# EAGLE board ex.05 (EAGLE 9.6.2)
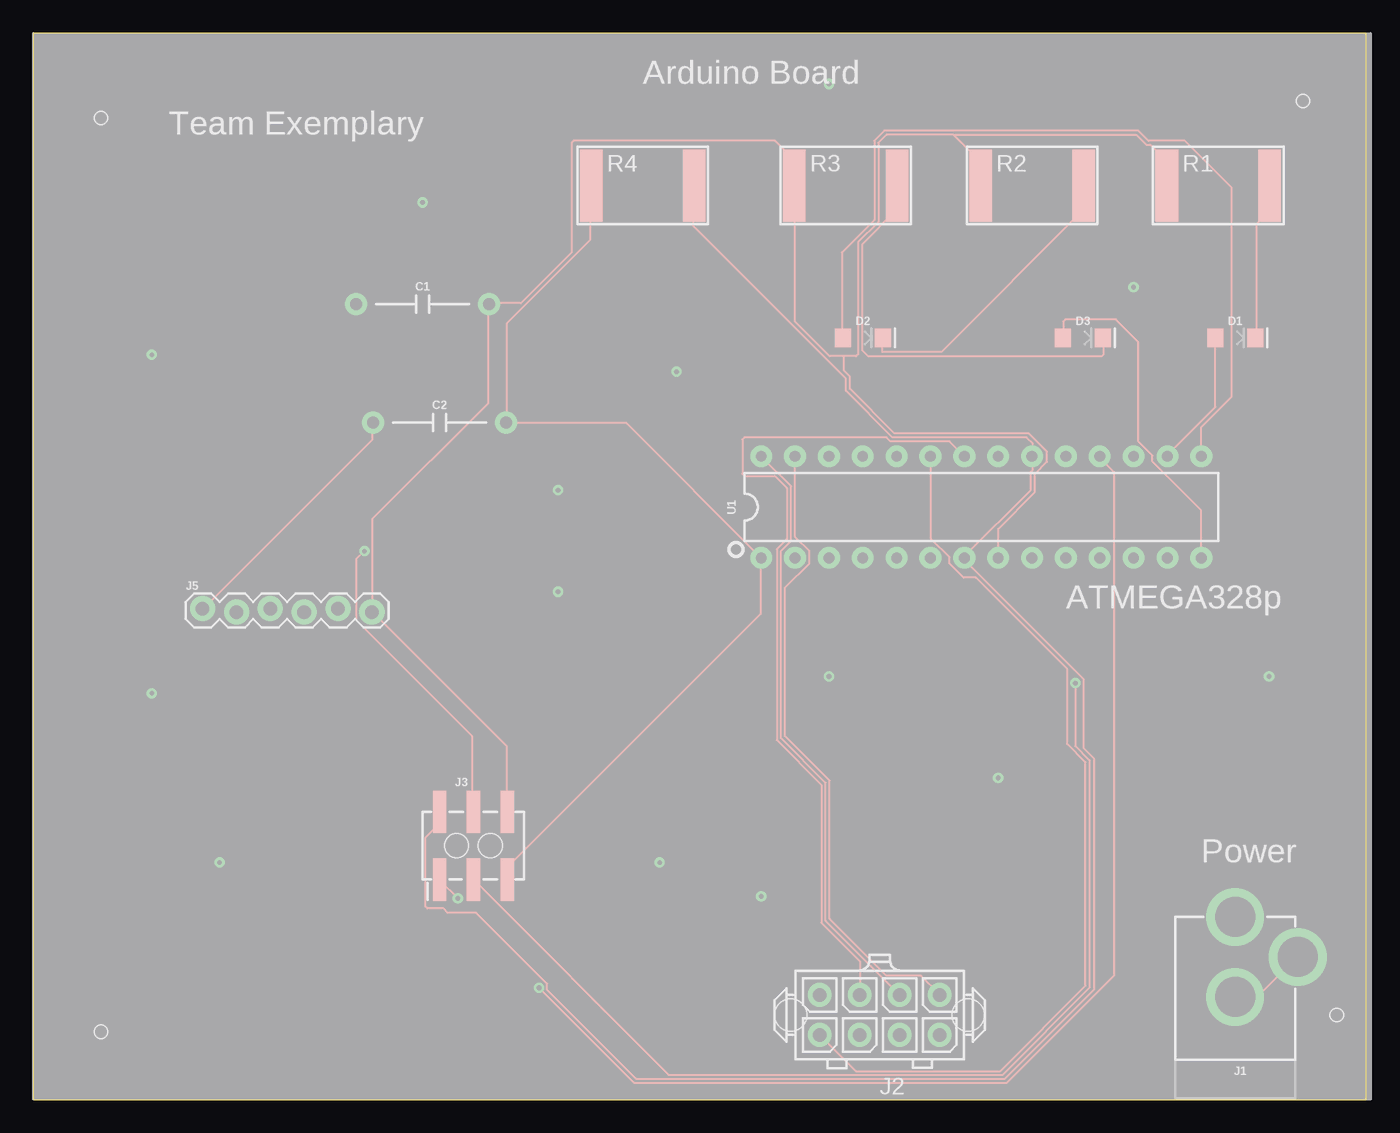
[diagram p0: board, top side]
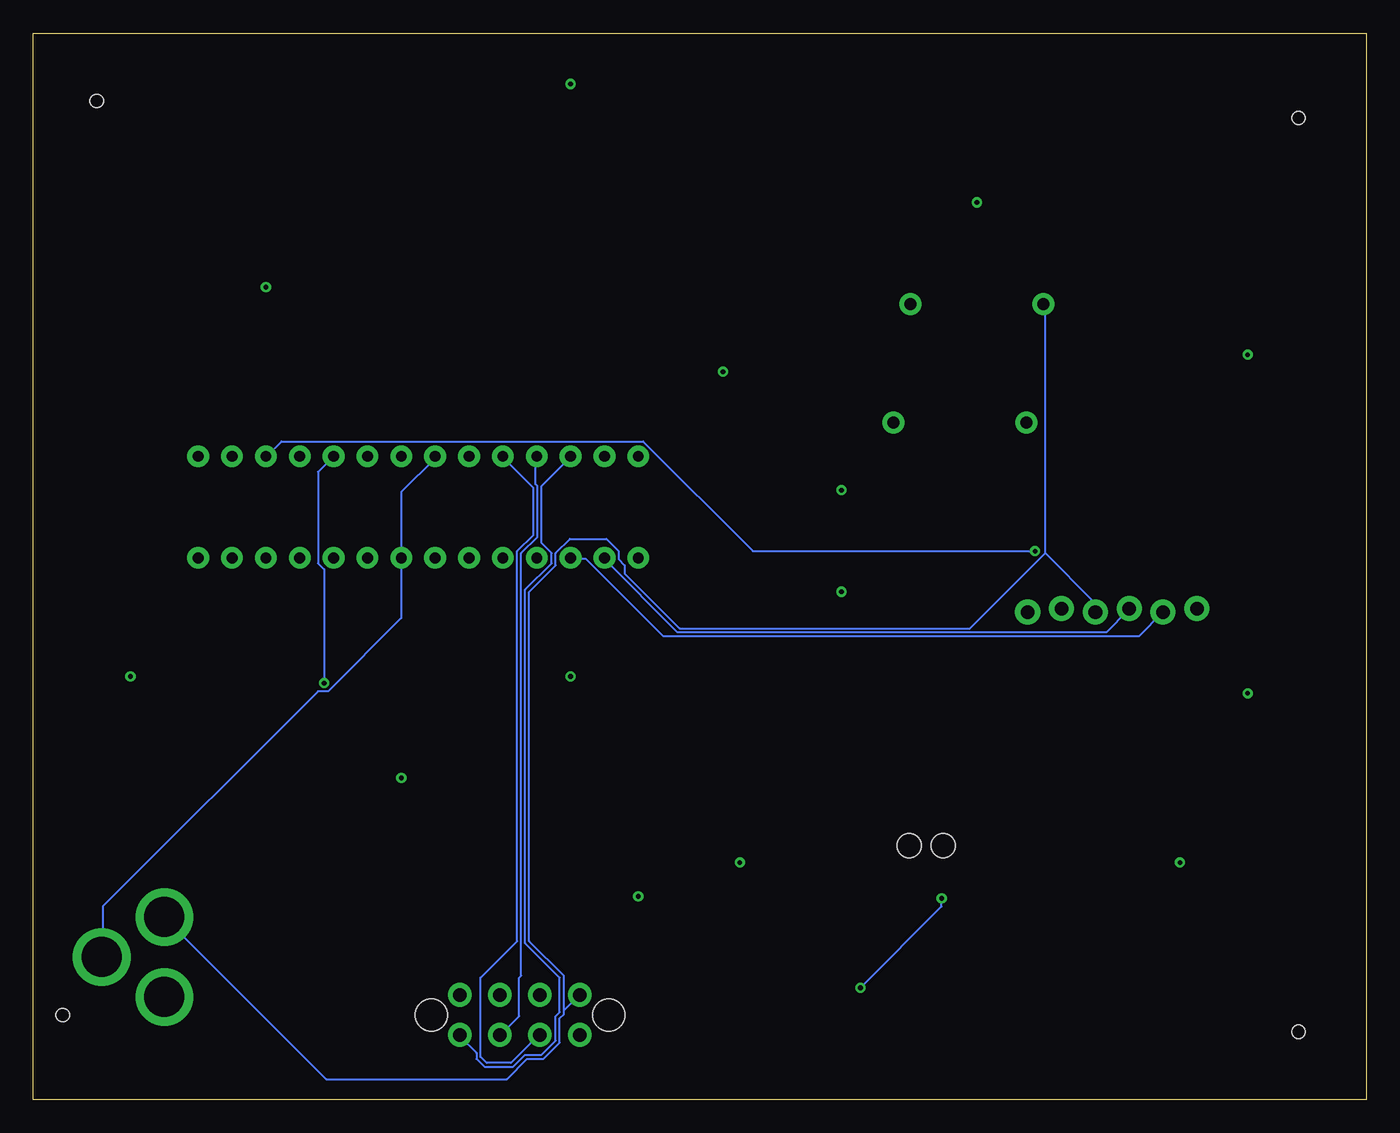
[diagram p1: board, bottom side, seen from below]

Size 100 x 80 mm. Coordinates in mm from the lower left corner, seen from the top.
Outline: 0,0 100,0 100,80 0,80 0,0
Copper layers (1*16): Top 0.035mm / dielectric 1.5mm / Bottom 0.035mm
Design rules "default": minimum track width 6mil, minimum drill 0.35mm, track to track 6mil, track to pad 6mil, pad to pad 6mil, via to via 6mil, smd to smd 6mil, copper to edge 40mil, drill to drill 6mil, minimum pad ring 10mil, minimum via ring 8mil, stop-mask expansion 4mil, vias tented up to drill 0mil, thermal gap 10mil
Holes 1 mm at 5.08,73.66 95.25,74.93 97.79,6.35 5.08,5.08

## Footprints (pad centres in the part's own frame; a part is rotated, then mirrored left to right if it is on the bottom)
CAP-PTH-10MM = drill 0.9 pad 1.651: 1 -5,0; 2 5,0
LED-1206 = smd 1.2 x 1.4: A -1.5,0; C 1.5,0
POWER_JACK_PTH = drill 2.997 pad 4.318: GND 0,7.7; GNDBREAK 4.7,10.7; PWR 0,13.7
794681-8 = drill 1 pad 1.778: 1 4.5,-1.5; 2 4.5,1.5; 3 1.5,-1.5; 4 1.5,1.5; 5 -1.5,-1.5; 6 -1.5,1.5; 7 -4.5,-1.5; 8 -4.5,1.5 | hole 2.4: 6.63,0; -6.67,0
2X3_SMT_POSTS = smd 1 x 3.17: 1 -2.54,-2.54; 2 -2.54,2.54; 3 0,-2.54; 4 0,2.54; 5 2.54,-2.54; 6 2.54,2.54 | hole 1.8: -1.27,0; 1.27,0
1X06_LOCK = drill 1.016 pad 1.88: 1 0,0; 2 2.54,-0.254; 3 5.08,0; 4 7.62,-0.254; 5 10.16,0; 6 12.7,-0.254
PMD = smd 1.7 x 5.4: 1 3.861,0; 2 -3.861,0
DIP28 = drill 0.813 pad 1.626: 1 -16.51,-3.81; 2 -13.97,-3.81; 3 -11.43,-3.81; 4 -8.89,-3.81; 5 -6.35,-3.81; 6 -3.81,-3.81; 7 -1.27,-3.81; 8 1.27,-3.81; 9 3.81,-3.81; 10 6.35,-3.81; 11 8.89,-3.81; 12 11.43,-3.81; 13 13.97,-3.81; 14 16.51,-3.81; 15 16.51,3.81; 16 13.97,3.81; 17 11.43,3.81; 18 8.89,3.81; 19 6.35,3.81; 20 3.81,3.81; 21 1.27,3.81; 22 -1.27,3.81; 23 -3.81,3.81; 24 -6.35,3.81; 25 -8.89,3.81; 26 -11.43,3.81; 27 -13.97,3.81; 28 -16.51,3.81

## Placement (x,y rotation side)
C1  10nF  [CAP-PTH-10MM]  29.21,59.69 0 top
C2  10nF  [CAP-PTH-10MM]  30.48,50.8 0 top
D1  PINK  [LED-1206]  90.17,57.15 0 top
D2  PINK  [LED-1206]  62.23,57.15 0 top
D3  PINK  [LED-1206]  78.74,57.15 0 top
J1  POWER_JACK  [POWER_JACK_PTH]  90.17,0 0 top
J2  794681-8  [794681-8]  63.5,6.35 0 top
J3  AVR_SPI_PROG_3X2SMD  [2X3_SMT_POSTS]  33.02,19.05 0 top
J5  [1X06_LOCK]  12.7,36.83 0 top
R1  [PMD]  88.9,68.58 0 top
R2  [PMD]  74.93,68.58 0 top
R3  [PMD]  60.96,68.58 0 top
R4  [PMD]  45.72,68.58 0 top
U1  328P  [DIP28]  71.12,44.45 0 top

## Library data of the parts
C1 C2 = SparkFun-Capacitors; PROD_ID: CAP-09321
D1-D3 = SparkFun-LED; PROD_ID: DIO-10415
J1 = SparkFun-Connectors; PROD_ID: CONN-08197
J2 = con-amp
J3 = SparkFun-Connectors
J5 = SparkFun-Connectors; PROD_ID: CONN-08437
R1-R4 = resistor-shunt; OC_FARNELL: unknown; OC_NEWARK: unknown
U1 = SparkFun-IC-Microcontroller; PROD_ID: IC-09136

## Nets
CTS: J5.5
DTR: C2.1 J5.1
GND: C1.2 J1.GND J1.GNDBREAK J2.6 J3.6 J5.6 R1.2 R2.2 R3.2 U1.8 U1.22
MISO: J3.1 U1.18
MOSI: J3.4 U1.17
N$2: D3.A U1.14
N$3: D2.A U1.15
N$4: D1.A U1.16
N$5: D1.C R1.1
N$6: D2.C R2.1
N$7: D3.C R3.1
N$8: J2.7 U1.23
N$9: J2.5 U1.24
N$10: J2.3 U1.25
N$11: J2.1 U1.26
N$12: J2.4 U1.28
N$13: J2.2 U1.27
RESET: C2.2 J3.5 R4.2 U1.1
RX: J5.3 U1.2
SCK: J3.3 U1.19
TX: J5.2 U1.3
VCC: C1.1 J1.PWR J2.8 J5.4
VCCIO: J3.2 R4.1 U1.7 U1.20

## Tracks (layer width: path | path; a pad name or v marks a point on that pad's centre or on a via)
DTR
  Top 0.152: C2.1 25.45,50.75 25.45,49.53 12.8,36.88 J5.1
GND
  Top 0.152: 25.45,36.58 35.51,26.52 35.51,21.64 J3.6 | 25.45,36.58 25.45,43.59 34.14,52.27 34.14,59.59 C1.2 34.29,59.74 36.58,59.74 40.39,63.55 40.39,71.78 40.54,71.93 55.63,71.93 57.15,70.41 57.15,68.58 | 25.45,36.58 J5.6 | 57.15,68.58 57.15,58.37 59.74,55.78 60.81,55.78 | 60.81,55.78 61.72,55.78 61.87,55.93 61.87,64.31 63.4,65.84 63.4,71.78 64.01,72.39 69.04,72.39 | 69.04,72.39 71.02,70.41 71.02,68.58 R2.2 | R1.2 85.04,70.41 83.82,71.63 83.52,71.63 82.75,72.39 69.04,72.39 | J1.GND 90.22,7.77 91.9,7.77 94.79,10.67 J1.GNDBREAK | U1.22 68.73,49.38 64.31,49.38 64.01,49.68 53.34,49.68 53.19,49.53 53.19,46.94 53.34,46.79 55.63,46.79 56.54,45.87 56.54,42.06 55.78,41.3 55.78,26.98 59.13,23.62 59.13,13.26 62.03,10.36 62.03,7.92 J2.6 | 60.81,55.78 60.81,54.71 61.27,54.25 61.27,53.34 64.62,49.99 74.68,49.99 76.05,48.62 76.05,47.85 75.13,46.94 75.13,45.57 72.39,42.82 U1.8 | 57.15,68.58 R3.2
  Bottom 0.152: U1.22 69.8,48.16 72.39,45.57 U1.8 72.39,36.12 77.88,30.63 78.64,30.63 94.79,14.48 94.79,10.82 J1.GNDBREAK
MISO  (via drill 0.35)
  Top 0.152: v31.85,15.09 30.48,16.46 J3.1 | v37.95,8.38 45.11,1.22 73,1.22 81.08,9.3 81.08,47.09 80.01,48.16 U1.18
  Bottom 0.152: v31.85,15.09 31.85,14.48 v37.95,8.38
MOSI  (via drill 0.35)
  Top 0.152: v24.84,41.15 24.23,40.54 24.23,35.97 32.92,27.28 32.92,21.64 J3.4
  Bottom 0.152: v24.84,41.15 46.02,41.15 54.25,49.38 81.38,49.38 82.45,48.31 U1.17
N$1  (via drill 0.35)
  other vias: 8.89,55.88
N$2
  Top 0.152: U1.14 87.63,44.2 83.97,47.85 83.97,48.31 82.91,49.38 82.91,56.84 81.23,58.52 77.42,58.52 77.27,58.37 77.27,57.15 D3.A
N$3
  Top 0.152: U1.15 87.63,50.44 89.92,52.73 89.92,68.43 86.41,71.93 83.67,71.93 82.91,72.69 63.86,72.69 63.09,71.93 63.09,65.99 60.66,63.55 60.66,57.15 D2.A
N$4
  Top 0.152: D1.A 88.7,57.15 88.7,51.97 85.04,48.31 U1.16
N$5
  Top 0.152: D1.C 91.75,57.15 91.75,65.68 92.81,66.75 92.81,68.58 R1.1
N$6
  Top 0.152: R2.1 78.79,66.75 68.12,56.08 63.7,56.08 63.7,57.15 D2.C
N$7
  Top 0.152: D3.C 80.31,57.15 80.31,55.93 80.16,55.78 62.64,55.78 62.18,56.24 62.18,64.16 64.77,66.75 64.77,68.58 R3.1
N$8
  Top 0.152: U1.23 67.36,48.16 67.36,42.06 68.73,40.69 68.73,40.23 69.8,39.17 70.71,39.17 77.57,32.31 77.57,26.67 78.94,25.3 78.94,8.53 72.54,2.13 61.72,2.13 59.13,4.72 J2.7
N$9
  Bottom 0.152: U1.24 64.77,48.16 62.48,45.87 62.48,42.37 63.7,41.15 63.7,11.89 66.45,9.14 66.45,3.2 65.99,2.74 64.16,2.74 62.03,4.88 J2.5
N$10
  Bottom 0.152: U1.25 62.33,48.16 62.33,46.18 62.18,46.02 62.18,42.22 63.4,41 63.4,9.3 63.55,9.14 63.55,6.25 64.92,4.88 J2.3
N$11
  Bottom 0.152: U1.26 59.74,48.16 61.87,46.02 61.87,41.76 61.11,41 61.11,40.23 63.09,38.25 63.09,11.73 60.5,9.14 60.5,6.55 60.81,6.25 60.81,4.42 61.87,3.35 63.09,3.35 64.01,2.44 66.14,2.44 66.75,3.05 66.75,3.5 67.97,4.72 J2.1
N$12
  Top 0.152: U1.28 56.84,46.02 56.84,41.91 56.08,41.15 56.08,27.13 59.44,23.77 59.44,13.41 64.92,7.92 J2.4
N$13
  Top 0.152: U1.27 57.15,42.22 58.22,41.15 58.22,40.23 56.39,38.41 56.39,27.28 59.74,23.93 59.74,13.56 64.01,9.3 66.6,9.3 67.97,7.92 J2.2
N$14  (via drill 0.35)
  other vias: 29.21,67.31
N$15  (via drill 0.35)
  other vias: 13.97,17.78
N$16  (via drill 0.35)
  other vias: 54.61,15.24
N$17  (via drill 0.35)
  other vias: 72.39,24.13
N$18  (via drill 0.35)
  other vias: 92.71,31.75
N$19  (via drill 0.35)
  other vias: 48.26,54.61
N$20  (via drill 0.35)
  other vias: 82.55,60.96
N$21  (via drill 0.35)
  other vias: 59.69,76.2
N$22  (via drill 0.35)
  other vias: 8.89,30.48
N$23  (via drill 0.35)
  other vias: 39.37,38.1
N$24  (via drill 0.35)
  other vias: 39.37,45.72
N$25  (via drill 0.35)
  other vias: 46.99,17.78
N$26  (via drill 0.35)
  other vias: 59.69,31.75
RESET
  Top 0.152: R4.2 41.76,68.58 41.76,64.47 35.51,58.22 35.51,50.9 C2.2 35.51,50.75 44.5,50.75 U1.1 54.56,40.54 54.56,36.42 35.66,17.53 35.66,16.61 J3.5
RX
  Bottom 0.152: U1.2 57.15,40.54 51.66,35.05 19.51,35.05 17.83,36.73 J5.3
SCK  (via drill 0.35)
  Top 0.152: J3.3 47.7,1.83 72.69,1.83 79.25,8.38 79.25,25.45 78.18,26.52 v78.18,31.24
  Bottom 0.152: v78.18,31.24 78.18,39.78 78.64,40.23 78.64,47.09 U1.19
TX
  Bottom 0.152: J5.2 17.07,34.75 52.73,34.75 58.52,40.54 59.59,40.54 U1.3
VCC
  Bottom 0.152: 24.08,41 24.08,59.59 C1.1 | 24.08,41 20.42,37.34 20.42,36.58 J5.4 | 60.2,6.71 59.13,7.77 J2.8 | 60.2,6.71 60.2,6.4 60.5,6.1 60.5,4.27 61.72,3.05 62.94,3.05 64.47,1.52 78.03,1.52 90.07,13.56 J1.PWR | 24.08,41 29.72,35.36 51.51,35.36 55.63,39.47 55.63,40.08 56.08,40.54 56.08,41.15 57,42.06 59.74,42.06 60.81,41 60.81,40.08 62.79,38.1 62.79,11.89 60.2,9.3 60.2,6.71
VCCIO
  Top 0.152: J3.2 30.48,20.73 29.41,19.66 29.41,14.48 29.57,14.33 30.79,14.33 31.09,14.02 33.22,14.02 38.56,8.69 38.56,8.23 45.26,1.52 72.85,1.52 79.55,8.23 79.55,25.6 78.79,26.36 78.79,31.55 69.8,40.54 U1.7 69.8,40.69 74.83,45.72 74.83,47.09 74.98,47.24 74.98,48.16 U1.20 74.98,48.31 74.98,49.23 74.52,49.68 64.47,49.68 60.96,53.19 60.96,54.1 49.53,65.53 49.53,68.58 R4.1

## Text on the board
tNames: Arduino Board | Team Exemplary | ATMEGA328p | Power